# EAGLE board scHnRk_6 (EAGLE 7.5.0)
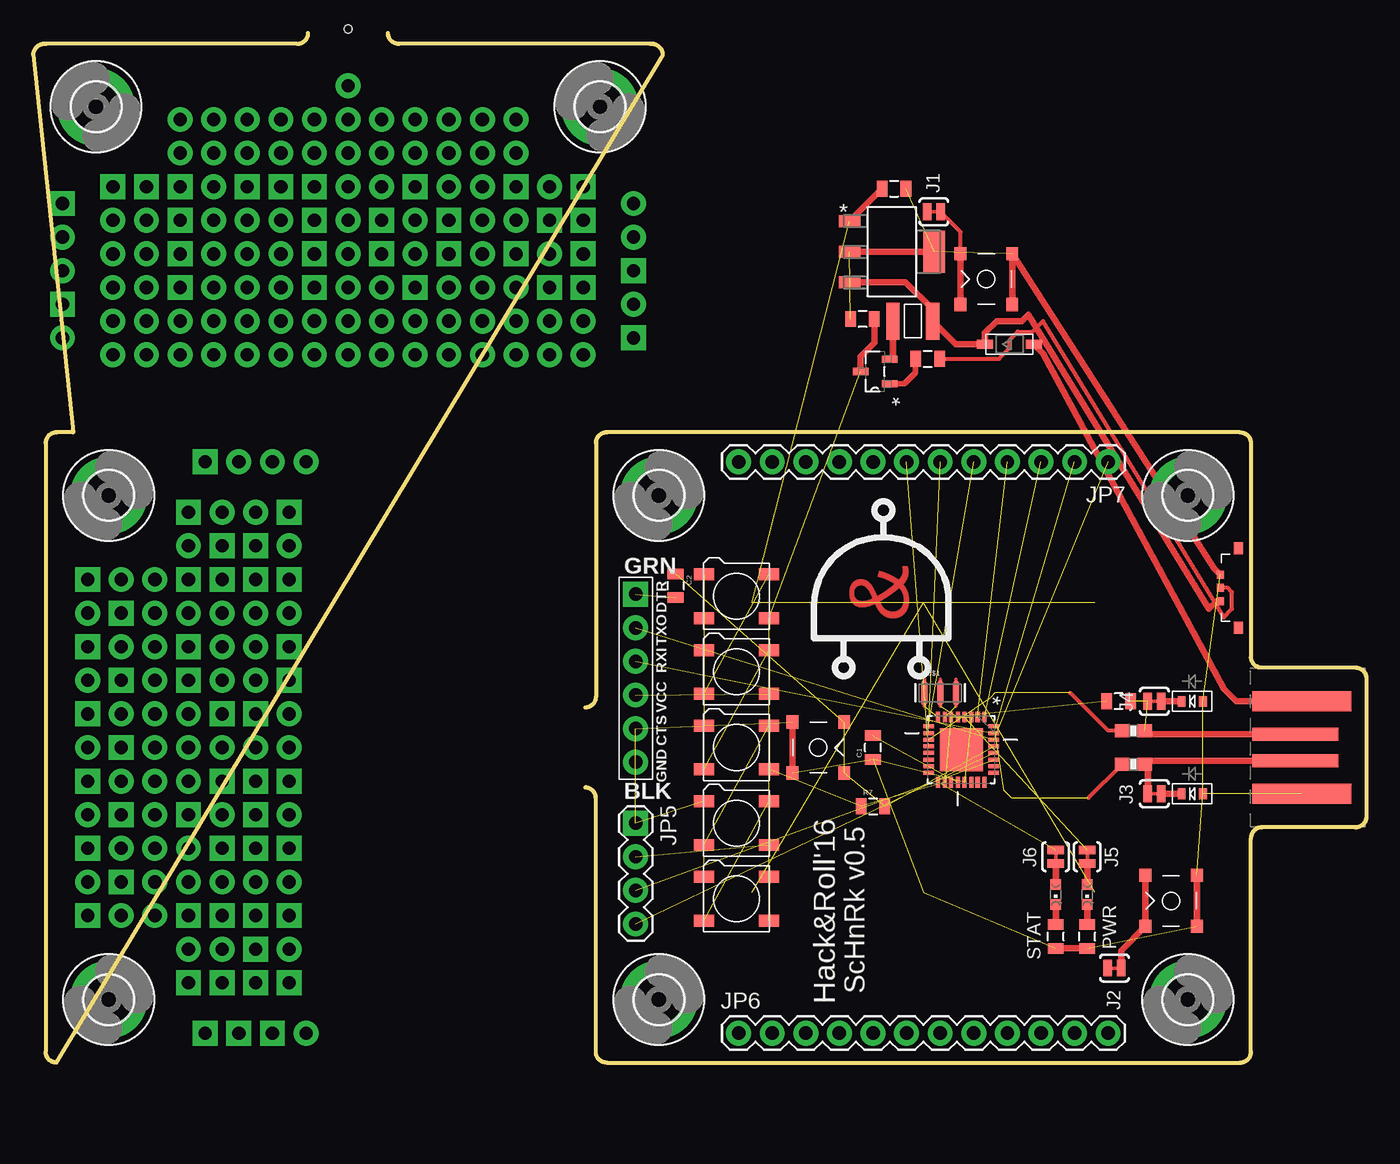
[diagram p0: board, top side]
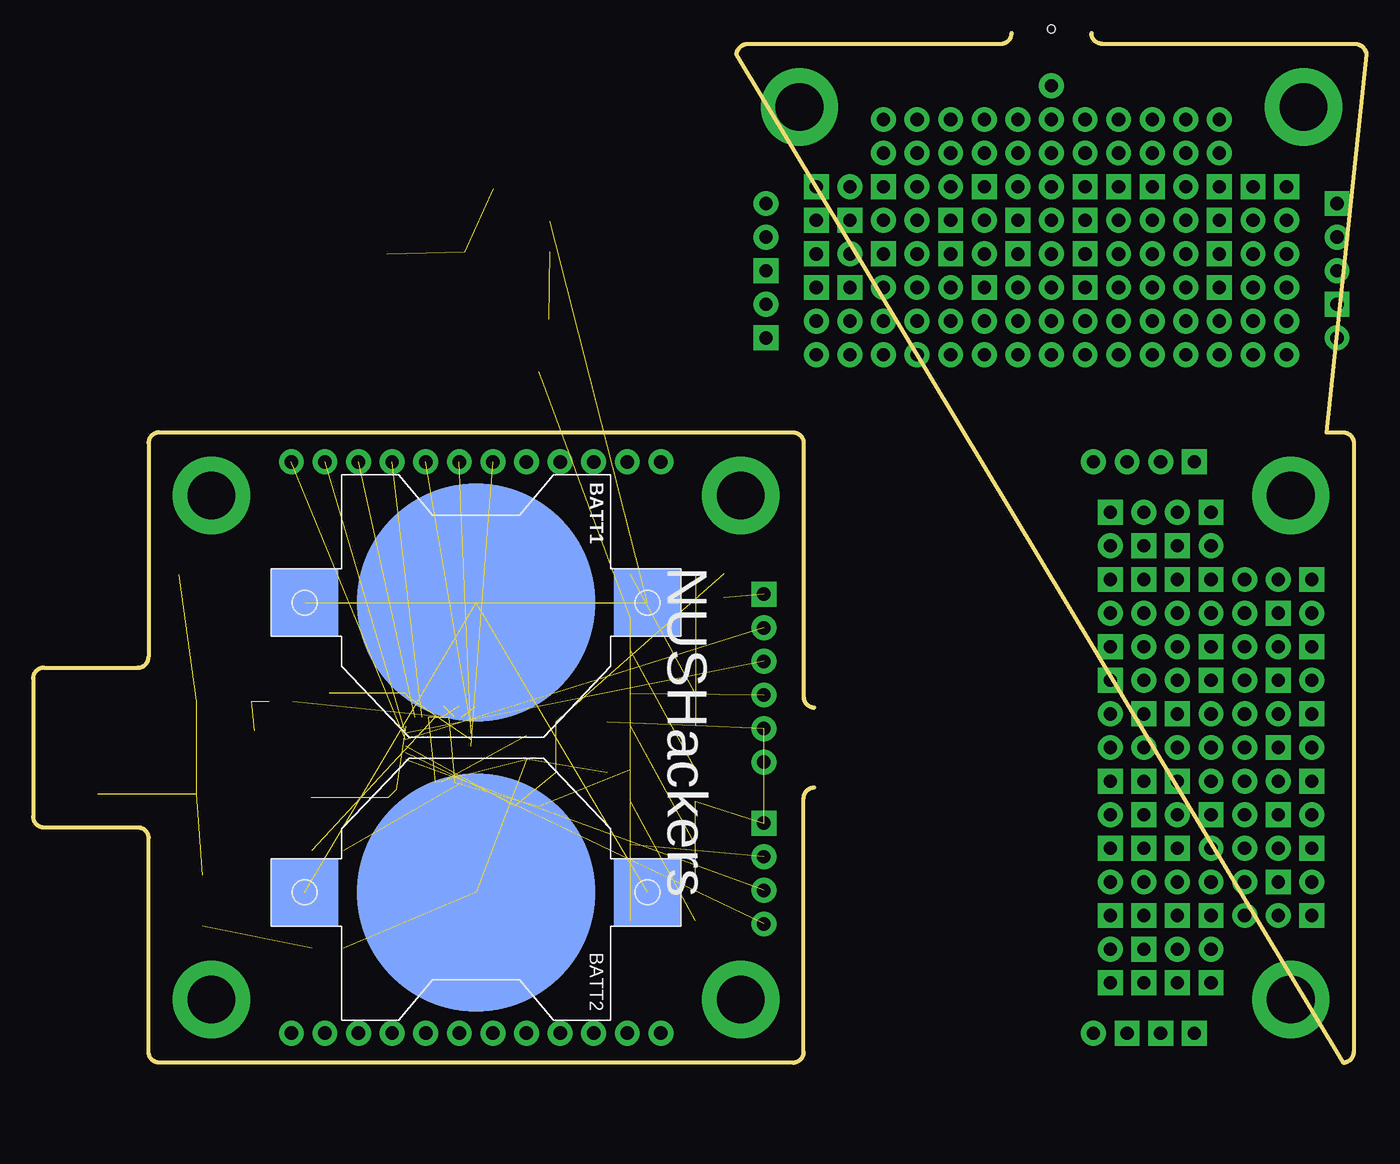
[diagram p1: board, bottom side, seen from below]

Size 100.81 x 77.81 mm. Coordinates in mm from the lower left corner, seen from the top.
Outline: 3.04,47.62 0,76.18 arc-90 0.97,76.99 19.98,76.99 arc90 20.8,77.81
Outline: 26.83,77.79 26.83,77.81 arc90 27.64,76.99 46.65,76.99 arc-90 47.62,76.18 1.77,0 arc-90 0.95,0.81 0.95,46.81 arc-90 1.77,47.62 3.02,47.62
Outline: 41.73,26.83 arc90 42.55,27.64 42.55,46.81 arc-90 43.36,47.62 91.26,47.62 arc-90 92.08,46.81 92.08,30.66 arc90 92.89,29.84 99.99,29.84 arc-90 100.81,29.03 100.81,18.59 arc-90 99.99,17.78 92.89,17.78 arc90 92.08,16.97 92.08,0.81 arc-90 91.26,0 43.36,0 arc-90 42.55,0.81 42.55,19.98 arc90 41.73,20.8
Copper layers (1*16): Top 0.035mm / dielectric 1.5mm / Bottom 0.035mm
Design rules "EagleRules": minimum track width 7mil, minimum drill 12mil, track to track 7mil, track to pad 7mil, pad to pad 7mil, via to via 7mil, smd to smd 0mil, copper to edge 20mil, drill to drill 10mil, minimum pad ring 10mil, minimum via ring 6mil, stop-mask expansion 2mil, vias tented up to drill 25mil, thermal gap 10mil
Net classes: 0 default: clearance 25.4 mm
Holes 0.6 mm at 23.81,78.11

## Footprints (pad centres in the part's own frame; a part is rotated, then mirrored left to right if it is on the bottom)
CR2032-SMD = smd 5.08 x 5.08: +$1 -12.954,0; +$2 12.954,0 | smd 18 x 18: - 0,0
0805 = smd 0.8 x 1.2: 1 -0.9,0; 2 0.9,0
SOD-123 = smd 1.2 x 0.7: A 1.85,0; C -1.85,0
SOD-523 = smd 0.8 x 0.6: A 0,-0.8; K 0,0.8
MC36214 = smd 1 x 2.8: P$1 -1.5,0; P$2 1.5,0
3,6-PAD = drill 3.6 pad 5.842: B3,6 0,0
PAD-JUMPER-2-NC_BY_TRACE_YES_SILK = smd 0.635 x 1.27: 1 -0.508,0; 2 0.508,0
USB-A-PCB = smd 7.5 x 1.5: 5V -0.2,-3.5; GND -0.2,3.5 | smd 6.5 x 1: USB_M 0.3,-1; USB_P 0.3,1
FTDI_DEVICE_SIDE = drill 1.016 pad 1.88 square: P$1 -6.35,0 | drill 1.016 pad 1.88: P$2 -3.81,0; P$3 -1.27,0; P$4 1.27,0; P$5 3.81,0; P$6 6.35,0
1X04 = drill 1.016 pad 1.88 square: 1 0,0 | drill 1.016 pad 1.88: 2 2.54,0; 3 5.08,0; 4 7.62,0
1X12 = drill 1.016 pad 1.88: 1 0,0; 2 2.54,0; 3 5.08,0; 4 7.62,0; 5 10.16,0; 6 12.7,0; 7 15.24,0; 8 17.78,0; 9 20.32,0; 10 22.86,0; 11 25.4,0; 12 27.94,0
WS2812B = smd 1.5 x 0.9: 1-VDD 2.45,-1.65; 2-DOUT 2.45,1.65; 3-GND -2.45,1.65; 4-DIN -2.45,-1.65
CHIPLED_0603 = smd 0.8 x 0.8: A 0,-0.75; C 0,0.75
0603-RES = smd 1.1 x 1: 1 -0.85,0; 2 0.85,0
SSAJ120100 = smd 0.6 x 0.51: P$1 -1,1.36; P$2 1,1.36; P$C 0,1.36 | smd 0.9 x 0.7: P$3 -3,0; P$4 3,0
SKRBAGE010 = smd 1 x 0.9: P$1 -1.925,1.95; P$2 -1.925,-1.95; P$3 1.925,1.95; P$4 1.925,-1.95
SOT230P700X180-4N = smd 1.626 x 0.889: 1 -3.2,2.311; 2 -3.2,0; 3 -3.2,-2.311 | smd 1.626 x 3.175: 4 3.2,0
SOT95P230X110-3N = smd 1.168 x 0.533: 1 -1.092,0.94; 2 -1.092,-0.94; 3 1.092,0
QFN50P500X500X100-33N = smd 0.813 x 0.305: 1 -2.464,1.753; 2 -2.464,1.245; 3 -2.464,0.762; 4 -2.464,0.254; 5 -2.464,-0.254; 6 -2.464,-0.762; 7 -2.464,-1.245; 8 -2.464,-1.753; 17 2.464,-1.753; 18 2.464,-1.245; 19 2.464,-0.762; 20 2.464,-0.254; 21 2.464,0.254; 22 2.464,0.762; 23 2.464,1.245; 24 2.464,1.753 | smd 0.305 x 0.813: 9 -1.753,-2.464; 10 -1.245,-2.464; 11 -0.762,-2.464; 12 -0.254,-2.464; 13 0.254,-2.464; 14 0.762,-2.464; 15 1.245,-2.464; 16 1.753,-2.464; 25 1.753,2.464; 26 1.245,2.464; 27 0.762,2.464; 28 0.254,2.464; 29 -0.254,2.464; 30 -0.762,2.464; 31 -1.245,2.464; 32 -1.753,2.464 | smd 3.251 x 3.251: 33 0,0
RESONATOR-SMD = smd 0.45 x 1.905: 1 -1.2,0; 2 0,0; 3 1.2,0

## Placement (x,y rotation side)
BATT1  [CR2032-SMD]  67.31,34.77 0 bottom
BATT2  [CR2032-SMD]  67.31,12.86 180 bottom
C1  0.1uF  [0805]  63.5,23.81 90 top
C2  0.1uF  [0805]  48.58,36.04 270 top
C3  10uF  [0805]  65.09,66.04 0 top
C4  10uF  [0805]  62.71,56.2 180 top
D1  B0520LW-7-F  [SOD-123]  73.82,54.29 0 top
D2  3.6 Zener  [SOD-523]  87.63,20.32 90 top
D3  3.6 Zener  [SOD-523]  87.63,27.3 90 top
F1  MC36214  [MC36214]  66.52,56.04 180 top
H1  MOUNT-PAD-ROUND3.6  [3,6-PAD]  42.86,72.23 90 top
H2  MOUNT-PAD-ROUND3.6  [3,6-PAD]  5.71,4.76 0 top
H3  MOUNT-PAD-ROUND3.6  [3,6-PAD]  4.76,72.23 90 top
H4  MOUNT-PAD-ROUND3.6  [3,6-PAD]  5.71,42.86 0 top
H5  MOUNT-PAD-ROUND3.6  [3,6-PAD]  47.31,4.76 0 top
H6  MOUNT-PAD-ROUND3.6  [3,6-PAD]  87.31,42.86 0 top
H7  MOUNT-PAD-ROUND3.6  [3,6-PAD]  47.31,42.86 0 top
H8  MOUNT-PAD-ROUND3.6  [3,6-PAD]  87.31,4.76 0 top
J1  JUMPER  [PAD-JUMPER-2-NC_BY_TRACE_YES_SILK]  68.1,64.29 0 top
J2  JUMPER  [PAD-JUMPER-2-NC_BY_TRACE_YES_SILK]  81.76,7.14 0 top
J3  JUMPER  [PAD-JUMPER-2-NC_BY_TRACE_YES_SILK]  84.77,20.32 180 top
J4  JUMPER  [PAD-JUMPER-2-NC_BY_TRACE_YES_SILK]  84.77,27.3 180 top
J5  JUMPER  [PAD-JUMPER-2-NC_BY_TRACE_YES_SILK]  79.69,15.56 90 top
J6  JUMPER  [PAD-JUMPER-2-NC_BY_TRACE_YES_SILK]  77.31,15.56 90 top
JP3  USBPCB  [USB-A-PCB]  95.73,23.81 180 top
JP4  FTDI_DEVICE  [FTDI_DEVICE_SIDE]  45.56,29.05 270 top
JP5  [1X04]  45.56,18.1 270 top
JP6  [1X12]  53.34,2.22 0 top
JP7  [1X12]  81.28,45.4 180 top
LED1  WS2812B5050  [WS2812B]  53.18,35.24 0 top
LED2  WS2812B5050  [WS2812B]  53.18,29.53 0 top
LED3  PWR  [CHIPLED_0603]  79.69,12.7 180 top
LED4  D1  [CHIPLED_0603]  77.31,12.7 180 top
LED5  WS2812B5050  [WS2812B]  53.18,23.81 0 top
LED6  WS2812B5050  [WS2812B]  53.18,18.1 0 top
LED7  WS2812B5050  [WS2812B]  53.18,12.38 0 top
R1  1K5  [0805]  82.07,27.3 180 top
R2  66.5  [0603-RES]  83.19,25.08 180 top
R3  66.5  [0603-RES]  83.19,22.54 180 top
R4  180R  [0805]  79.69,9.53 90 top
R5  180R  [0805]  77.31,9.53 90 top
R6  1K5  [0805]  67.63,53.18 0 top
R7  10k  [0805]  63.5,19.37 0 top
SW1  SSAJ120100  [SSAJ120100]  91.12,35.88 90 top
SW2  L_BUTTON  [SKRBAGE010]  72.07,59.21 90 top
SW3  R_BUTTON  [SKRBAGE010]  86.04,12.22 90 top
SW4  RESET  [SKRBAGE010]  59.37,23.81 270 top
U1  MCP1825S-5002E/DB  [SOT230P700X180-4N]  64.93,61.28 0 top
U2  PMV32UP  [SOT95P230X110-3N]  63.66,52.23 180 top
U4  ATMEGA328P-MU  [QFN50P500X500X100-33N]  70.17,23.65 270 top
U$1  16MHZ  [RESONATOR-SMD]  68.58,27.94 0 top

## Library data of the parts
BATT1 BATT2 D1-D3 LED1-LED7 = adafruit
C1-C4 J1-J6 R1-R7 = SparkFun-Passives
F1 SW1-SW4 = scHnRk
H1-H8 = holes
JP3-JP7 = SparkFun-Connectors
U1 = Microchip_By_element14_Batch_1; MPN: MCP1825S-5002E/DB; OC_FARNELL: 1578407; OC_NEWARK: 26M9964; PACKAGE: SOT-223-3; SUPPLIER: Microchip
U2 = NXP_By_element14_Batch_1; MPN: PMV32UP; OC_FARNELL: 1894624; OC_NEWARK: 47T2356; PACKAGE: SOT-3; SUPPLIER: NXP Semiconductors
U4 = Atmel_By_element14_Batch_1-00; MPN: ATMEGA328P-MU; OC_FARNELL: 1748522; OC_NEWARK: 26R2526; PACKAGE: QFN-32; SUPPLIER: Atmel
U$1 = SparkFun-FreqCtrl; PROD_ID: XTAL-08900

## Nets
5V: C4.1 J5.2 JP4.P$4 JP5.2 LED1.1-VDD LED2.1-VDD LED5.1-VDD LED6.1-VDD LED7.1-VDD R1.2 R7.1 U2.3 U4.4 U4.6 U4.18
A0: U4.23
A1: U4.24
A2: U4.25
A3: U4.26
A4/SDA: JP5.3 U4.27
A5/SCL: JP5.4 U4.28
A6: U4.19
A7: U4.22
D0/RXD: JP4.P$2 JP7.1 U4.30
D1/TXD: JP4.P$3 JP7.2 U4.31
D2: R3.2 U4.32
D3: JP7.3 U4.1
D4: JP7.4 U4.2
D5: JP7.5 U4.9
D6: JP7.6 U4.10
D7: R2.2 U4.11
D8: JP7.7 U4.12
D9: U4.13
D10: U4.14
D11/MOSI: U4.15
D12/MISO: U4.16
D13/SCK: J6.2 U4.17
GND: BATT2.- C1.1 C3.2 C4.2 D2.A D3.A JP3.GND JP4.P$5 JP4.P$6 JP5.1 LED1.3-GND LED2.3-GND LED5.3-GND LED6.3-GND LED7.3-GND R4.1 R5.1 SW1.P$2 SW2.P$2 SW2.P$4 SW3.P$2 SW3.P$4 SW4.P$2 SW4.P$4 U1.2 U1.4 U4.3 U4.5 U4.21 U$1.2
HEATSINK: U4.33
N$1: BATT1.- BATT2.+$1 BATT2.+$2
N$2: J1.2 SW2.P$1 SW2.P$3
N$3: LED1.2-DOUT LED2.4-DIN
N$4: LED2.2-DOUT LED5.4-DIN
N$5: LED5.2-DOUT LED6.4-DIN
N$6: LED6.2-DOUT LED7.4-DIN
N$7: R6.2 SW1.P$C
N$8: J2.2 SW3.P$1 SW3.P$3
N$9: D2.K J3.1
N$10: D3.K J4.1
N$15: J4.2 JP3.USB_M R1.1 R2.1
N$16: J3.2 JP3.USB_P R3.1
N$20: R6.1 U2.1
N$21: JP7.12
N$22: F1.P$2 U2.2
N$23: JP7.11
N$25: C2.2 JP4.P$1
N$26: LED1.4-DIN
N$28: LED3.C R4.2
N$29: LED4.C R5.2
N$31: J5.1 LED3.A
N$34: J6.1 LED4.A
N$62: C1.2 U4.20
N$81: JP7.10
N$84: JP7.9
N$85: JP7.8
N$256: JP6.12
N$264: JP6.11
N$265: JP6.10
N$266: JP6.9
N$267: JP6.8
N$268: JP6.7
N$269: JP6.6
N$271: JP6.5
N$272: JP6.4
N$273: JP6.3
N$274: JP6.2
N$285: JP6.1
N$307: J1.1
N$308: J2.1
PRE5V: D1.C F1.P$1 SW1.P$1 U1.3
RESET: C2.1 R7.2 SW4.P$1 SW4.P$3 U4.29
USBVCC: D1.A JP3.5V
VBATT: BATT1.+$1 BATT1.+$2 C3.1 U1.1
XTAL1: U4.7 U$1.3
XTAL2: U4.8 U$1.1

## Tracks (layer width: path | path; a pad name or v marks a point on that pad's centre or on a via)
5V  (13 unrouted)
  Top 0.508: C4.1 63.61,54.4 62.57,53.36 U2.3
A4/SDA  (1 unrouted)
A5/SCL  (1 unrouted)
D0/RXD  (2 unrouted)
D1/TXD  (2 unrouted)
D2  (3 unrouted)
  Top 0.305: 79.8,20 R3.2
D3  (1 unrouted)
D4  (1 unrouted)
D5  (1 unrouted)
D6  (1 unrouted)
D7  (3 unrouted)
  Top 0.305: R2.2 81.28,25.08 78.42,27.94
D8  (1 unrouted)
D13/SCK  (1 unrouted)
GND  (23 unrouted)
  Top 0.508: SW2.P$2 SW2.P$4 89.31,37.33 SW1.P$2 | SW3.P$4 SW3.P$2 | SW4.P$2 SW4.P$4 | U1.2 U1.4 | R5.1 R4.1
  pour Top: 43.36,47.62 91.26,47.62 arc-90 92.08,46.81 92.08,0.81 arc-90 91.26,0 43.36,0 arc-90 42.55,0.81 42.55,46.81 arc-90
  pour Bottom: 43.36,47.62 91.26,47.62 arc-90 92.08,46.81 92.08,0.81 arc-90 91.26,0 43.36,0 arc-90 42.55,0.81 42.55,46.81 arc-90
N$1  (2 unrouted)
N$2
  Top 0.305: SW2.P$3 70.12,62.78 J1.2
  Top 0.508: SW2.P$3 SW2.P$1
N$3  (1 unrouted)
N$4  (1 unrouted)
N$5  (1 unrouted)
N$6  (1 unrouted)
N$7
  Top 0.305: R6.2 73.03,53.18 73.82,53.98 73.82,54.61 74.45,55.24 75.56,55.24 76.36,56.04 90.01,33.66 90.65,34.29 90.65,35.56 90.33,35.88 SW1.P$C
N$8
  Top 0.508: SW3.P$3 SW3.P$1 82.26,8.47 J2.2
N$9
  Top 0.508: D2.K J3.1
N$10
  Top 0.508: D3.K J4.1
N$12  (via drill 1 pad 1.88)
  other vias: 23.81,73.82
N$13  (via drill 1 pad 1.88)
  other vias: 21.27,71.28
N$14  (via drill 1 pad 1.88)
  other vias: 45.4,62.39
N$15  (2 unrouted)
  Top 0.508: JP3.USB_M 84.31,24.81 R2.1
N$16
  Top 0.508: JP3.USB_P 84.31,22.81 R3.1 84.26,22.31 J3.2
N$17  (via drill 1 pad 1.88)
  other vias: 18.73,71.28
N$18  (via drill 1 pad 1.88)
  other vias: 16.19,71.28
N$19  (via drill 1 pad 1.88)
  other vias: 13.65,71.28
N$20
  Top 0.406: U2.1 65.89,51.29 66.73,52.12 R6.1
N$22
  Top 0.508: F1.P$2 65.02,53.43 U2.2
N$25  (1 unrouted)
N$28
  Top 0.508: LED3.C R4.2
N$29
  Top 0.508: LED4.C R5.2
N$30  (via drill 1 pad 1.88)
  other vias: 11.11,71.28
N$31
  Top 0.508: J5.1 LED3.A
N$32  (via drill 1 pad 1.88)
  other vias: 13.65,68.74
N$33  (via drill 1 pad 1.88)
  other vias: 16.19,68.74
N$34
  Top 0.508: J6.1 LED4.A
N$35  (via drill 1 pad 1.88)
  other vias: 18.73,68.74
N$36  (via drill 1 pad 1.88)
  other vias: 21.27,68.74
N$37  (via drill 1 pad 1.88)
  other vias: 23.81,71.28
N$38  (via drill 1 pad 1.88)
  other vias: 26.35,71.28
N$39  (via drill 1 pad 1.88)
  other vias: 28.89,71.28
N$42  (via drill 1 pad 1.88)
  other vias: 31.43,71.28
N$44  (via drill 1 pad 1.88)
  other vias: 33.97,71.28
N$45  (via drill 1 pad 1.88)
  other vias: 36.51,71.28
N$53  (via drill 1 pad 1.88)
  other vias: 26.35,68.74
N$54  (via drill 1 pad 1.88)
  other vias: 23.81,68.74
N$55  (via drill 1 pad 1.88)
  other vias: 21.27,66.2
N$56  (via drill 1 pad 1.88)
  other vias: 18.73,66.2
N$57  (via drill 1 pad 1.88)
  other vias: 16.19,66.2
N$58  (via drill 1 pad 1.88)
  other vias: 13.65,66.2
N$59  (via drill 1 pad 1.88)
  other vias: 11.11,68.74
N$62  (1 unrouted)
N$64  (via drill 1 pad 1.88)
  other vias: 6.03,66.2
N$65  (via drill 1 pad 1.88)
  other vias: 8.57,66.2
N$66  (via drill 1 pad 1.88)
  other vias: 11.11,66.2
N$67  (via drill 1 pad 1.88)
  other vias: 13.65,63.66
N$68  (via drill 1 pad 1.88)
  other vias: 16.19,63.66
N$69  (via drill 1 pad 1.88)
  other vias: 18.73,63.66
N$70  (via drill 1 pad 1.88)
  other vias: 21.27,63.66
N$71  (via drill 1 pad 1.88)
  other vias: 23.81,66.2
N$72  (via drill 1 pad 1.88)
  other vias: 26.35,66.2
N$73  (via drill 1 pad 1.88)
  other vias: 28.89,66.2
N$74  (via drill 1 pad 1.88)
  other vias: 28.89,68.74
N$75  (via drill 1 pad 1.88)
  other vias: 31.43,68.74
N$76  (via drill 1 pad 1.88)
  other vias: 31.43,66.2
N$77  (via drill 1 pad 1.88)
  other vias: 33.97,68.74
N$78  (via drill 1 pad 1.88)
  other vias: 33.97,66.2
N$79  (via drill 1 pad 1.88)
  other vias: 36.51,66.2
N$80  (via drill 1 pad 1.88)
  other vias: 36.51,68.74
N$82  (via drill 1 pad 1.88)
  other vias: 39.05,66.2
N$83  (via drill 1 pad 1.88)
  other vias: 41.59,66.2
N$87  (via drill 1 pad 1.88)
  other vias: 26.35,63.66
N$88  (via drill 1 pad 1.88)
  other vias: 23.81,63.66
N$89  (via drill 1 pad 1.88)
  other vias: 21.27,61.12
N$90  (via drill 1 pad 1.88)
  other vias: 18.73,61.12
N$91  (via drill 1 pad 1.88)
  other vias: 16.19,61.12
N$92  (via drill 1 pad 1.88)
  other vias: 13.65,61.12
N$93  (via drill 1 pad 1.88)
  other vias: 11.11,63.66
N$94  (via drill 1 pad 1.88)
  other vias: 8.57,63.66
N$95  (via drill 1 pad 1.88)
  other vias: 6.03,63.66
N$96  (via drill 1 pad 1.88)
  other vias: 2.22,64.93
N$97  (via drill 1 pad 1.88)
  other vias: 2.22,62.39
N$98  (via drill 1 pad 1.88)
  other vias: 6.03,61.12
N$99  (via drill 1 pad 1.88)
  other vias: 8.57,61.12
N$100  (via drill 1 pad 1.88)
  other vias: 11.11,61.12
N$101  (via drill 1 pad 1.88)
  other vias: 13.65,58.58
N$102  (via drill 1 pad 1.88)
  other vias: 16.19,58.58
N$103  (via drill 1 pad 1.88)
  other vias: 18.73,58.58
N$104  (via drill 1 pad 1.88)
  other vias: 21.27,58.58
N$105  (via drill 1 pad 1.88)
  other vias: 23.81,61.12
N$106  (via drill 1 pad 1.88)
  other vias: 26.35,61.12
N$107  (via drill 1 pad 1.88)
  other vias: 28.89,61.12
N$108  (via drill 1 pad 1.88)
  other vias: 28.89,63.66
N$109  (via drill 1 pad 1.88)
  other vias: 31.43,63.66
N$110  (via drill 1 pad 1.88)
  other vias: 31.43,61.12
N$111  (via drill 1 pad 1.88)
  other vias: 33.97,63.66
N$112  (via drill 1 pad 1.88)
  other vias: 33.97,61.12
N$113  (via drill 1 pad 1.88)
  other vias: 36.51,61.12
N$114  (via drill 1 pad 1.88)
  other vias: 36.51,63.66
N$115  (via drill 1 pad 1.88)
  other vias: 39.05,63.66
N$116  (via drill 1 pad 1.88)
  other vias: 39.05,61.12
N$117  (via drill 1 pad 1.88)
  other vias: 41.59,61.12
N$118  (via drill 1 pad 1.88)
  other vias: 41.59,63.66
N$119  (via drill 1 pad 1.88)
  other vias: 45.4,64.93
N$120  (via drill 1 pad 1.88)
  other vias: 45.4,59.85
N$121  (via drill 1 pad 1.88)
  other vias: 26.35,58.58
N$122  (via drill 1 pad 1.88)
  other vias: 23.81,58.58
N$123  (via drill 1 pad 1.88)
  other vias: 21.27,56.04
N$124  (via drill 1 pad 1.88)
  other vias: 18.73,56.04
N$125  (via drill 1 pad 1.88)
  other vias: 16.19,56.04
N$126  (via drill 1 pad 1.88)
  other vias: 13.65,56.04
N$127  (via drill 1 pad 1.88)
  other vias: 11.11,58.58
N$128  (via drill 1 pad 1.88)
  other vias: 8.57,58.58
N$129  (via drill 1 pad 1.88)
  other vias: 6.03,58.58
N$130  (via drill 1 pad 1.88)
  other vias: 2.22,59.85
N$131  (via drill 1 pad 1.88)
  other vias: 2.22,57.31
N$132  (via drill 1 pad 1.88)
  other vias: 6.03,56.04
N$133  (via drill 1 pad 1.88)
  other vias: 8.57,56.04
N$134  (via drill 1 pad 1.88)
  other vias: 11.11,56.04
N$135  (via drill 1 pad 1.88)
  other vias: 13.65,53.5
N$136  (via drill 1 pad 1.88)
  other vias: 16.19,53.5
N$137  (via drill 1 pad 1.88)
  other vias: 18.73,53.5
N$138  (via drill 1 pad 1.88)
  other vias: 21.27,53.5
N$139  (via drill 1 pad 1.88)
  other vias: 23.81,56.04
N$140  (via drill 1 pad 1.88)
  other vias: 26.35,56.04
N$141  (via drill 1 pad 1.88)
  other vias: 28.89,56.04
N$142  (via drill 1 pad 1.88)
  other vias: 28.89,58.58
N$143  (via drill 1 pad 1.88)
  other vias: 31.43,58.58
N$144  (via drill 1 pad 1.88)
  other vias: 31.43,56.04
N$145  (via drill 1 pad 1.88)
  other vias: 33.97,58.58
N$146  (via drill 1 pad 1.88)
  other vias: 33.97,56.04
N$147  (via drill 1 pad 1.88)
  other vias: 36.51,56.04
N$148  (via drill 1 pad 1.88)
  other vias: 36.51,58.58
N$149  (via drill 1 pad 1.88)
  other vias: 39.05,58.58
N$150  (via drill 1 pad 1.88)
  other vias: 39.05,56.04
N$151  (via drill 1 pad 1.88)
  other vias: 41.59,56.04
N$152  (via drill 1 pad 1.88)
  other vias: 41.59,58.58
N$153  (via drill 1 pad 1.88)
  other vias: 45.4,57.31
N$154  (via drill 1 pad 1.88)
  other vias: 45.4,54.77
N$155  (via drill 1 pad 1.88)
  other vias: 26.35,53.5
N$156  (via drill 1 pad 1.88)
  other vias: 23.81,53.5
N$157  (via drill 1 pad 1.88)
  other vias: 19.37,26.35
N$158  (via drill 1 pad 1.88)
  other vias: 19.37,28.89
N$159  (via drill 1 pad 1.88)
  other vias: 19.37,31.43
N$160  (via drill 1 pad 1.88)
  other vias: 19.37,33.97
N$161  (via drill 1 pad 1.88)
  other vias: 11.11,53.5
N$162  (via drill 1 pad 1.88)
  other vias: 8.57,53.5
N$163  (via drill 1 pad 1.88)
  other vias: 6.03,53.5
N$164  (via drill 1 pad 1.88)
  other vias: 2.22,54.77
N$165  (via drill 1 pad 1.88)
  other vias: 20.64,45.4
N$166  (via drill 1 pad 1.88)
  other vias: 19.37,41.59
N$167  (via drill 1 pad 1.88)
  other vias: 19.37,39.05
N$168  (via drill 1 pad 1.88)
  other vias: 19.37,36.51
N$169  (via drill 1 pad 1.88)
  other vias: 16.83,33.97
N$170  (via drill 1 pad 1.88)
  other vias: 16.83,31.43
N$171  (via drill 1 pad 1.88)
  other vias: 16.83,28.89
N$172  (via drill 1 pad 1.88)
  other vias: 16.83,26.35
N$173  (via drill 1 pad 1.88)
  other vias: 19.37,23.81
N$174  (via drill 1 pad 1.88)
  other vias: 19.37,21.27
N$175  (via drill 1 pad 1.88)
  other vias: 19.37,18.73
N$176  (via drill 1 pad 1.88)
  other vias: 28.89,53.5
N$177  (via drill 1 pad 1.88)
  other vias: 31.43,53.5
N$178  (via drill 1 pad 1.88)
  other vias: 19.37,16.19
N$179  (via drill 1 pad 1.88)
  other vias: 33.97,53.5
N$180  (via drill 1 pad 1.88)
  other vias: 19.37,13.65
N$181  (via drill 1 pad 1.88)
  other vias: 19.37,11.11
N$182  (via drill 1 pad 1.88)
  other vias: 36.51,53.5
N$183  (via drill 1 pad 1.88)
  other vias: 39.05,53.5
N$184  (via drill 1 pad 1.88)
  other vias: 19.37,8.57
N$185  (via drill 1 pad 1.88)
  other vias: 19.37,6.03
N$186  (via drill 1 pad 1.88)
  other vias: 41.59,53.5
N$187  (via drill 1 pad 1.88)
  other vias: 20.64,2.22
N$188  (via drill 1 pad 1.88)
  other vias: 18.1,2.22
N$189  (via drill 1 pad 1.88)
  other vias: 16.83,21.27
N$190  (via drill 1 pad 1.88)
  other vias: 16.83,23.81
N$191  (via drill 1 pad 1.88)
  other vias: 14.29,26.35
N$192  (via drill 1 pad 1.88)
  other vias: 14.29,28.89
N$193  (via drill 1 pad 1.88)
  other vias: 14.29,31.43
N$194  (via drill 1 pad 1.88)
  other vias: 14.29,33.97
N$195  (via drill 1 pad 1.88)
  other vias: 16.83,36.51
N$196  (via drill 1 pad 1.88)
  other vias: 16.83,39.05
N$197  (via drill 1 pad 1.88)
  other vias: 16.83,41.59
N$198  (via drill 1 pad 1.88)
  other vias: 18.1,45.4
N$199  (via drill 1 pad 1.88)
  other vias: 15.56,45.4
N$200  (via drill 1 pad 1.88)
  other vias: 14.29,41.59
N$201  (via drill 1 pad 1.88)
  other vias: 14.29,39.05
N$202  (via drill 1 pad 1.88)
  other vias: 14.29,36.51
N$203  (via drill 1 pad 1.88)
  other vias: 11.75,33.97
N$204  (via drill 1 pad 1.88)
  other vias: 11.75,31.43
N$205  (via drill 1 pad 1.88)
  other vias: 11.75,28.89
N$206  (via drill 1 pad 1.88)
  other vias: 11.75,26.35
N$207  (via drill 1 pad 1.88)
  other vias: 14.29,23.81
N$208  (via drill 1 pad 1.88)
  other vias: 14.29,21.27
N$209  (via drill 1 pad 1.88)
  other vias: 14.29,18.73
N$210  (via drill 1 pad 1.88)
  other vias: 16.83,18.73
N$211  (via drill 1 pad 1.88)
  other vias: 16.83,16.19
N$212  (via drill 1 pad 1.88)
  other vias: 14.29,16.19
N$213  (via drill 1 pad 1.88)
  other vias: 16.83,13.65
N$214  (via drill 1 pad 1.88)
  other vias: 14.29,13.65
N$215  (via drill 1 pad 1.88)
  other vias: 14.29,11.11
N$216  (via drill 1 pad 1.88)
  other vias: 16.83,11.11
N$217  (via drill 1 pad 1.88)
  other vias: 16.83,8.57
N$218  (via drill 1 pad 1.88)
  other vias: 14.29,8.57
N$219  (via drill 1 pad 1.88)
  other vias: 14.29,6.03
N$220  (via drill 1 pad 1.88)
  other vias: 16.83,6.03
N$221  (via drill 1 pad 1.88)
  other vias: 15.56,2.22
N$222  (via drill 1 pad 1.88)
  other vias: 13.02,2.22
N$223  (via drill 1 pad 1.88)
  other vias: 11.75,21.27
N$224  (via drill 1 pad 1.88)
  other vias: 11.75,23.81
N$225  (via drill 1 pad 1.88)
  other vias: 9.21,26.35
N$226  (via drill 1 pad 1.88)
  other vias: 9.21,28.89
N$227  (via drill 1 pad 1.88)
  other vias: 9.21,31.43
N$228  (via drill 1 pad 1.88)
  other vias: 9.21,33.97
N$229  (via drill 1 pad 1.88)
  other vias: 11.75,36.51
N$230  (via drill 1 pad 1.88)
  other vias: 11.75,39.05
N$231  (via drill 1 pad 1.88)
  other vias: 11.75,41.59
N$232  (via drill 1 pad 1.88)
  other vias: 13.02,45.4
N$236  (via drill 1 pad 1.88)
  other vias: 9.21,36.51
N$237  (via drill 1 pad 1.88)
  other vias: 6.67,33.97
N$238  (via drill 1 pad 1.88)
  other vias: 6.67,31.43
N$239  (via drill 1 pad 1.88)
  other vias: 6.67,28.89
N$240  (via drill 1 pad 1.88)
  other vias: 6.67,26.35
N$241  (via drill 1 pad 1.88)
  other vias: 9.21,23.81
N$242  (via drill 1 pad 1.88)
  other vias: 9.21,21.27
N$243  (via drill 1 pad 1.88)
  other vias: 9.21,18.73
N$244  (via drill 1 pad 1.88)
  other vias: 11.75,18.73
N$245  (via drill 1 pad 1.88)
  other vias: 11.75,16.19
N$246  (via drill 1 pad 1.88)
  other vias: 9.21,16.19
N$247  (via drill 1 pad 1.88)
  other vias: 11.75,13.65
N$248  (via drill 1 pad 1.88)
  other vias: 9.21,13.65
N$249  (via drill 1 pad 1.88)
  other vias: 9.21,11.11
N$250  (via drill 1 pad 1.88)
  other vias: 11.75,11.11
N$251  (via drill 1 pad 1.88)
  other vias: 11.75,8.57
N$254  (via drill 1 pad 1.88)
  other vias: 11.75,6.03
N$257  (via drill 1 pad 1.88)
  other vias: 6.67,21.27
N$258  (via drill 1 pad 1.88)
  other vias: 6.67,23.81
N$259  (via drill 1 pad 1.88)
  other vias: 4.13,26.35
N$260  (via drill 1 pad 1.88)
  other vias: 4.13,28.89
N$261  (via drill 1 pad 1.88)
  other vias: 4.13,31.43
N$262  (via drill 1 pad 1.88)
  other vias: 4.13,33.97
N$263  (via drill 1 pad 1.88)
  other vias: 6.67,36.51
N$270  (via drill 1 pad 1.88)
  other vias: 4.13,36.51
N$275  (via drill 1 pad 1.88)
  other vias: 4.13,23.81
N$276  (via drill 1 pad 1.88)
  other vias: 4.13,21.27
N$277  (via drill 1 pad 1.88)
  other vias: 4.13,18.73
N$278  (via drill 1 pad 1.88)
  other vias: 6.67,18.73
N$279  (via drill 1 pad 1.88)
  other vias: 6.67,16.19
N$280  (via drill 1 pad 1.88)
  other vias: 4.13,16.19
N$281  (via drill 1 pad 1.88)
  other vias: 6.67,13.65
N$282  (via drill 1 pad 1.88)
  other vias: 4.13,13.65
N$283  (via drill 1 pad 1.88)
  other vias: 4.13,11.11
N$284  (via drill 1 pad 1.88)
  other vias: 6.67,11.11
PRE5V
  Top 0.508: U1.3 65.97,58.97 68.02,56.92 F1.P$1 69.76,54.29 D1.C 71.97,55.14 72.87,56.04 74.77,56.04 75.25,56.52 88.9,34.29 89.49,34.88 SW1.P$1
RESET  (4 unrouted)
USBVCC
  Top 0.508: JP3.5V 90.96,27.31 90.01,28.26 76.36,53.6 D1.A
VBATT  (2 unrouted)
  Top 0.508: U1.1 C3.1
XTAL1  (1 unrouted)
XTAL2  (1 unrouted)

## Text on the board
Top: &
tPlace: Hack&Roll'16
tNames: PWR | STAT | ScHnRk v0.5
bNames: NUSHackers